# Allegro board MV3.brd
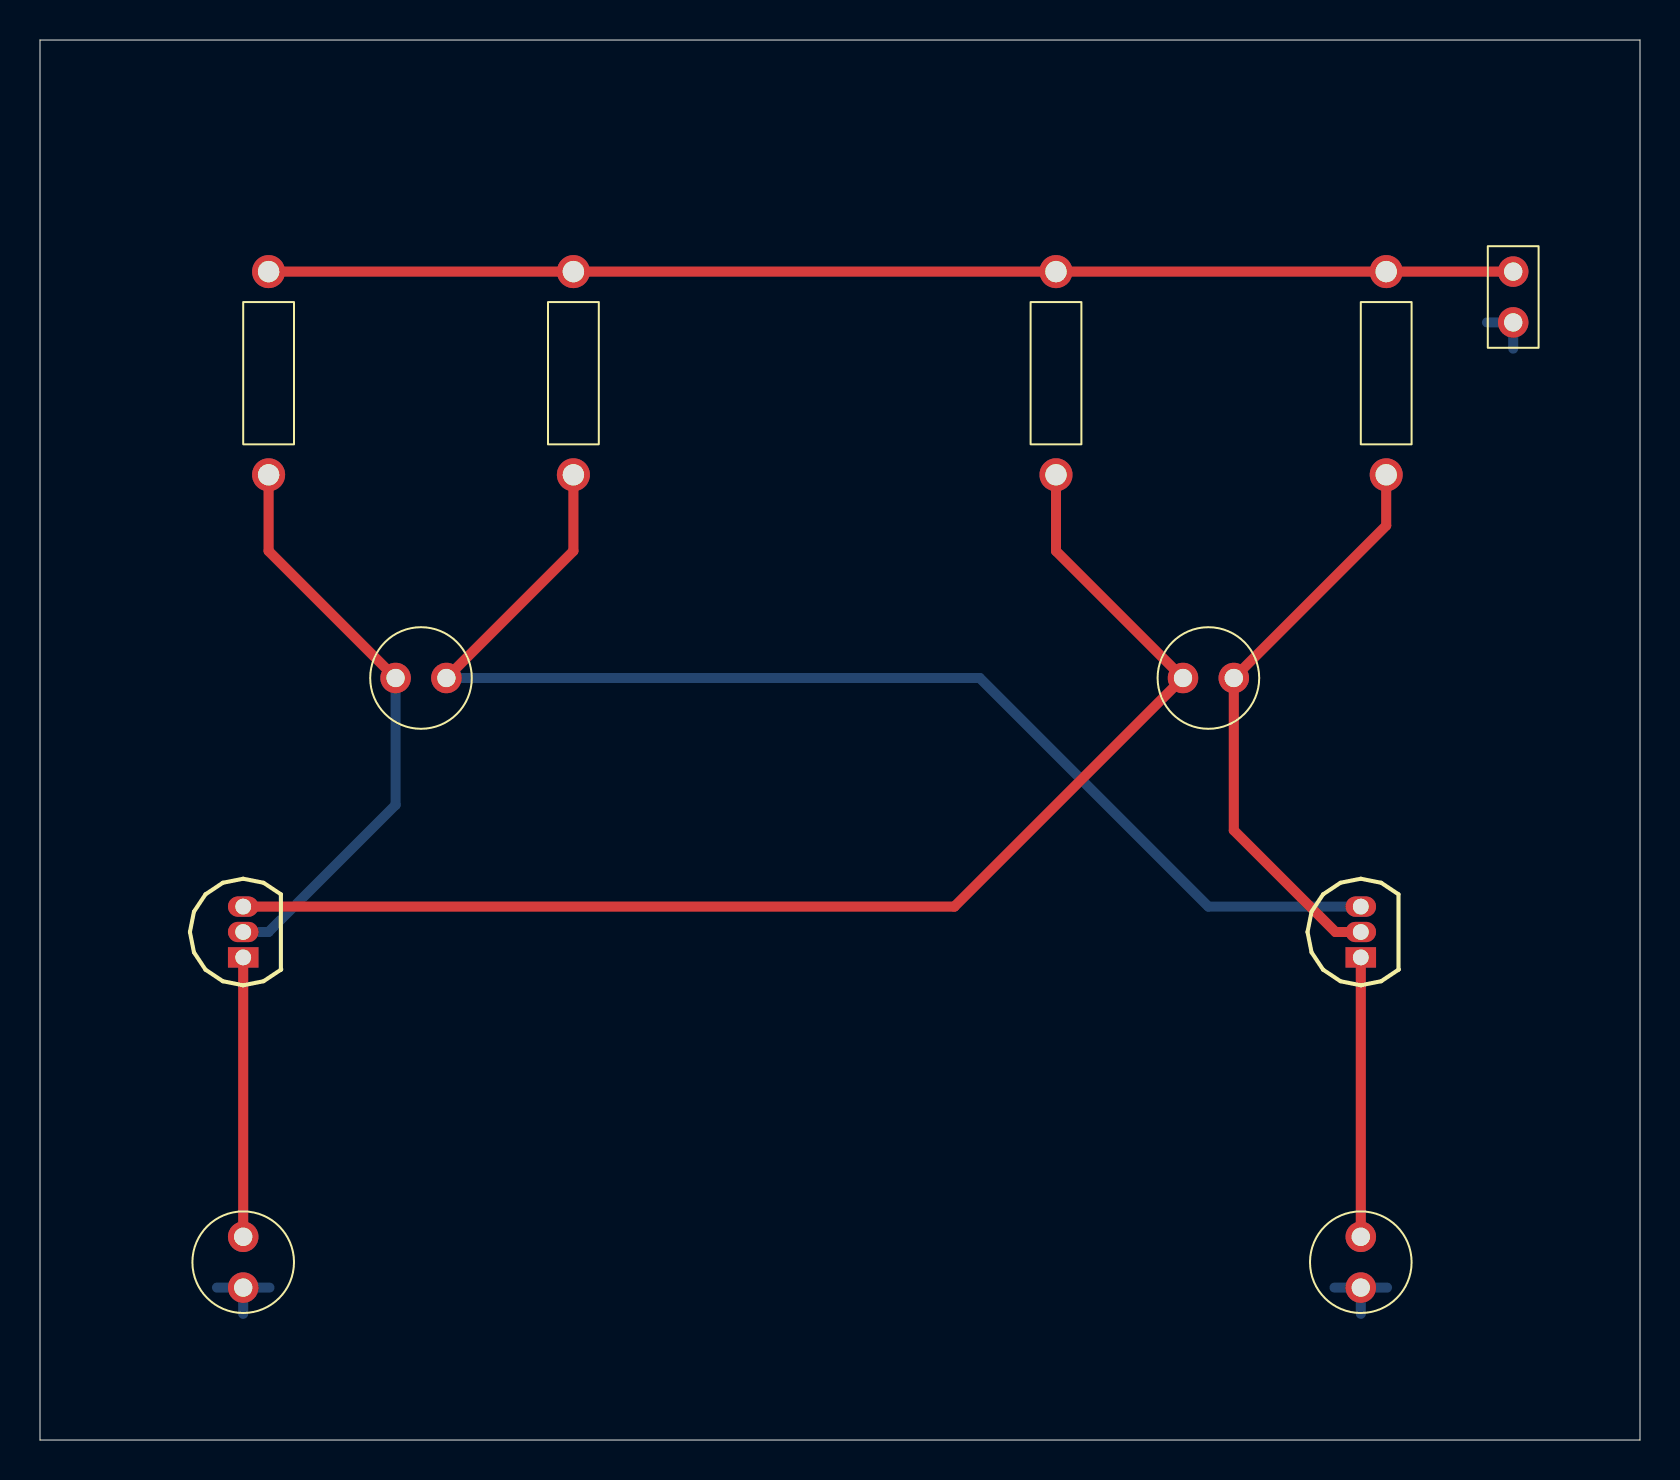
[diagram p0: board, top side]
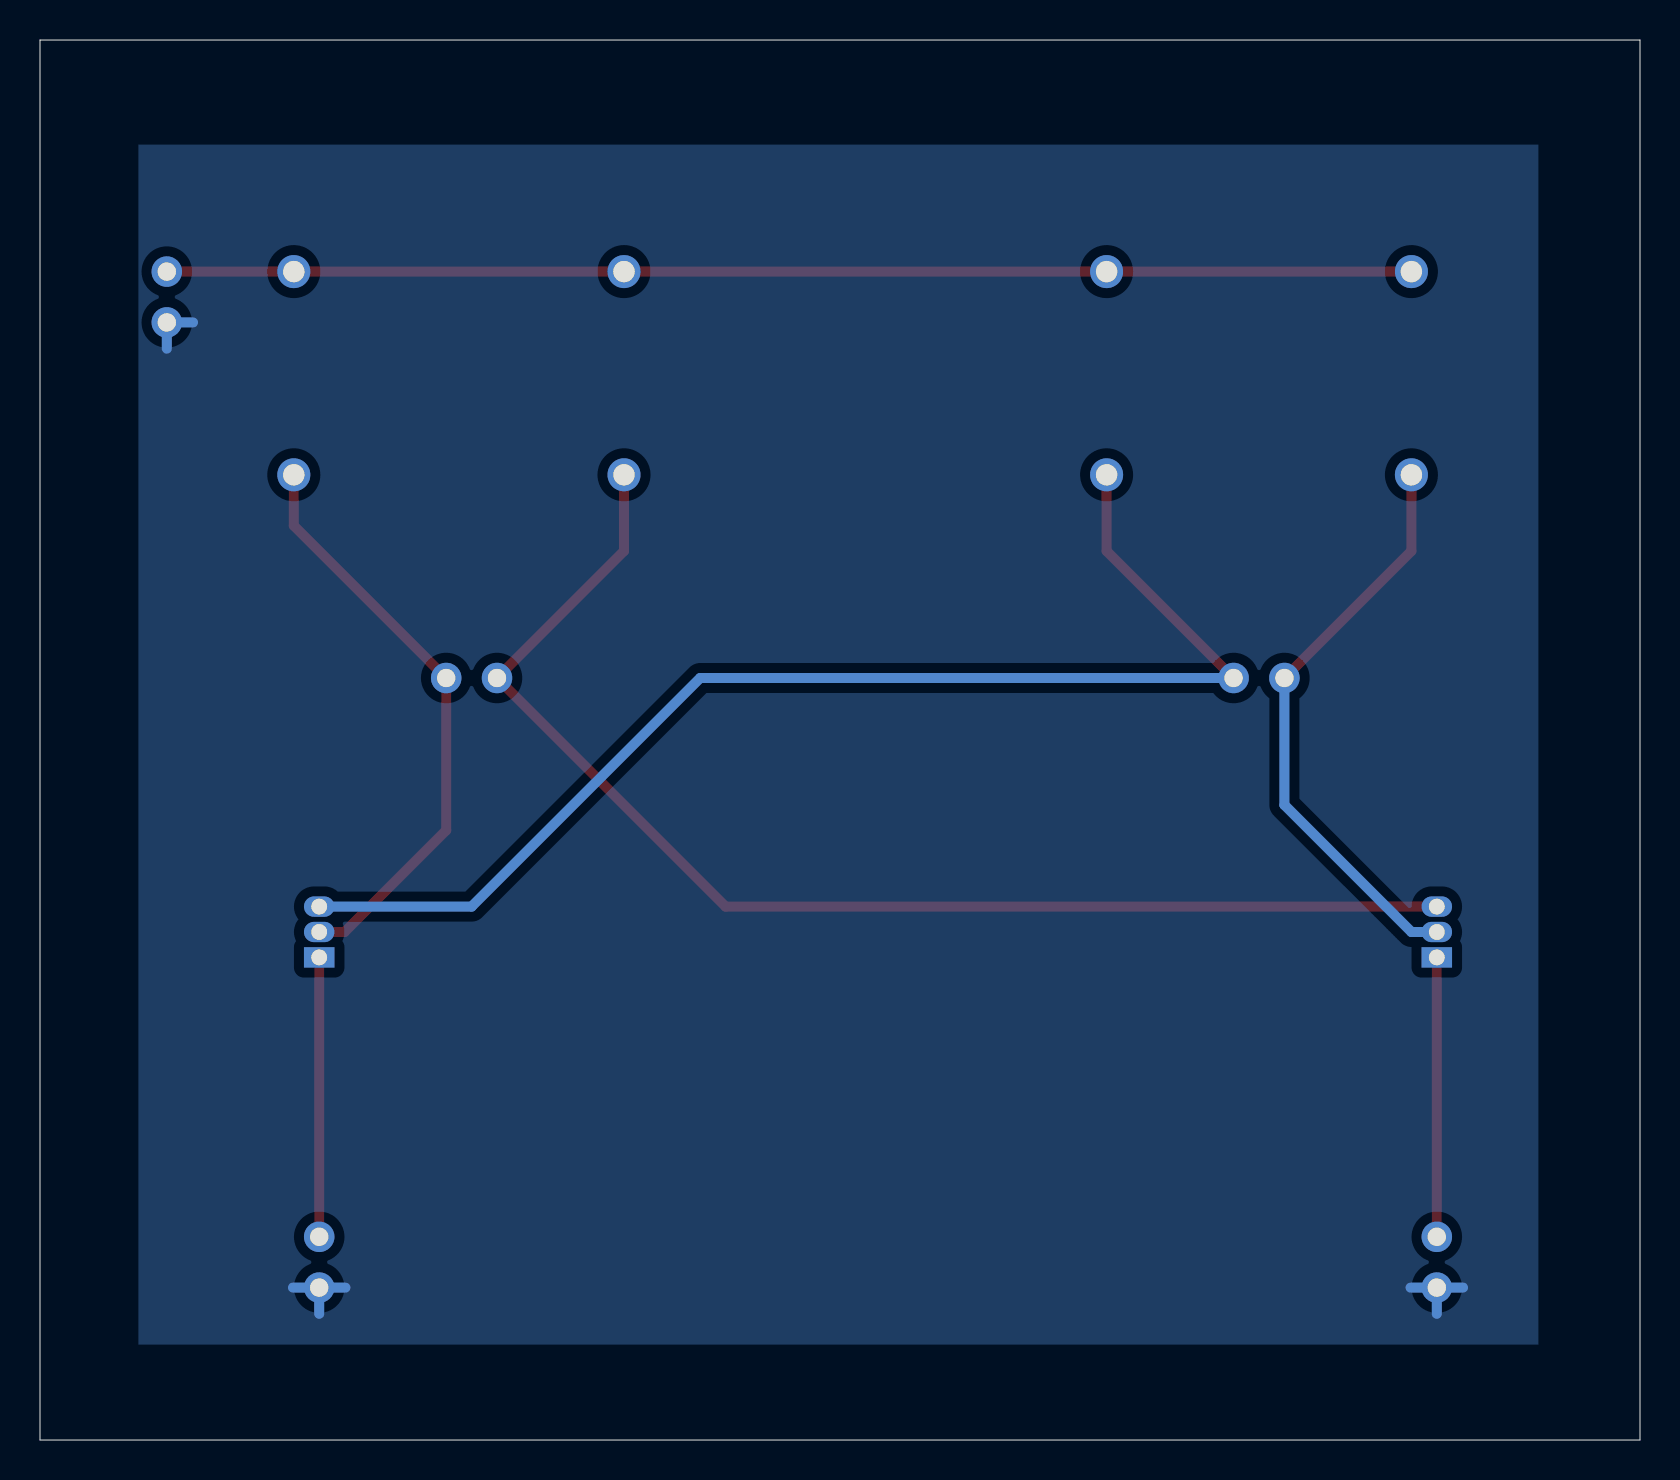
[diagram p1: board, bottom side, seen from below]

Outline 80 x 70 mm; copper layers: TOP, BOTTOM. Coordinates in mm from the lower left corner of the outline.
Outline path: 0,70 0,0 80,0 80,70 0,70

## Design rules (mm)
constraint set DEFAULT: min track width 0.5, pair gap 0.5

## Placement (name value [footprint] x y rotation side)
C1  22u  [CAP196]  17.78 38.1 270 top
C2  22u  [CAP196]  59.69 38.1 90 top
D1  LED  [CAP196]  10.16 7.62 0 top
D2  LED  [CAP196]  66.04 7.62 0 top
J1  CON2  [JUMPER2]  73.66 58.42 270 top
Q1  2SC1815  [TO92]  10.16 24.13 90 top
Q2  2SC1815  [TO92]  66.04 24.13 90 top
R1  220  [RES400]  11.43 58.42 180 top
R2  33k  [RES400]  26.67 58.42 180 top
R3  33k  [RES400]  50.8 58.42 180 top
R4  220  [RES400]  67.31 58.42 180 top

## Library data of the parts
C1 C2 = CAP POL: Tolerance: ***; User Part Number: ***
D1 D2 = LED: Tolerance: ***; User Part Number: ***
J1 = CON2: User Part Number: ***
Q1 Q2 = NPN ECB
R1-R4 = R: Tolerance: ***; User Part Number: ***

## Footprints (pads in the part's own frame, mm; a bottom-side part is the same pattern mirrored in y, then rotated)
CAP196
  round 1.524 hole 0.914: 1(0,0) 2(0,2.54)
JUMPER2
  round 1.524 hole 0.914: 1(0,0) 2(2.54,0)
RES400
  round 1.651 hole 1.067: 1(0,0) 2(0,10.16)
TO92
  rect 1.016x1.524 hole 0.787: 1(0,0)
  oval 1.016x1.524 hole 0.787: 2(1.27,0) 3(2.54,0)

## Nets
GND: D1.1(CATHODE) D2.1(CATHODE) J1.2
VCC: J1.1 R1.1 R2.1 R3.1 R4.1
N01110: C1.1 Q1.2 R1.2
N01124: D1.2 Q1.1(E)
N01128: D2.2 Q2.1(E)
N01200: C2.1 Q2.2 R4.2
N01214: C1.2 Q2.3 R2.2
N01223: C2.2 Q1.3 R3.2

## Routing (per net, layer and track width the routed paths; a pad name or vN(x,y) marks a point on that pad's centre or on a via; arc(x,y) is an arc through that point)
GND: length 10.5
  BOTTOM w0.5: D2.1 67.35,7.62 ; D2.1 66.04,6.31 ; D2.1 64.73,7.62 ; 8.85,7.62 D1.1 ; D1.1 10.16,6.31 ; D1.1 11.47,7.62 ; 72.35,55.88 J1.2 73.66,54.57
VCC: length 62.2
  TOP w0.5: R1.1 R2.1 R3.1 R4.1 J1.1
N01110: length 29.4
  TOP w0.5: C1.1 11.43,44.45 R1.2
  BOTTOM w0.5: C1.1 17.78,31.75 11.43,25.4 Q1.2
N01124: length 14
  TOP w0.5: Q1.1 D1.2
N01128: length 14
  TOP w0.5: D2.2 Q2.1
N01200: length 29.4
  TOP w0.5: Q2.2 64.77,25.4 59.69,30.48 C2.1 67.31,45.72 R4.2
N01214: length 63.2
  TOP w0.5: R2.2 26.67,44.45 C1.2
  BOTTOM w0.5: Q2.3 58.42,26.67 46.99,38.1 C1.2
N01223: length 64.5
  TOP w0.5: R3.2 50.8,44.45 C2.2 45.72,26.67 Q1.3

## Copper pours and planes (outline as drawn; the poured copper is in the pictures)
GND on BOTTOM: 75.08,4.77 75.08,64.77 5.08,64.77 5.08,4.77

## Text on the board
TOLERANCE_TOP: FIGURE | FINISHED_SIZE | 0.3302 | 0.7874 | 0.9144 | 1.0668 | DRILL CHART: TOP to BOTTOM | ALL UNITS ARE IN MILLIMETERS | PLATED | QTY | 2 | 6 | 10 | 8
